# Altium PCB ESP32W_Zzed.PcbDoc (part 1 of 2)
Units mil, origin at the board's own origin, x right, y up, seen from the top; angles counter-clockwise.
Board outline 1900 x 1100 mil, 4 copper layers (Top Layer, Int1 (GND), Int2 (PWR), Bottom Layer), stack 53.912 mil thick; 65 components, 66 nets, 305 pads, 82 vias.
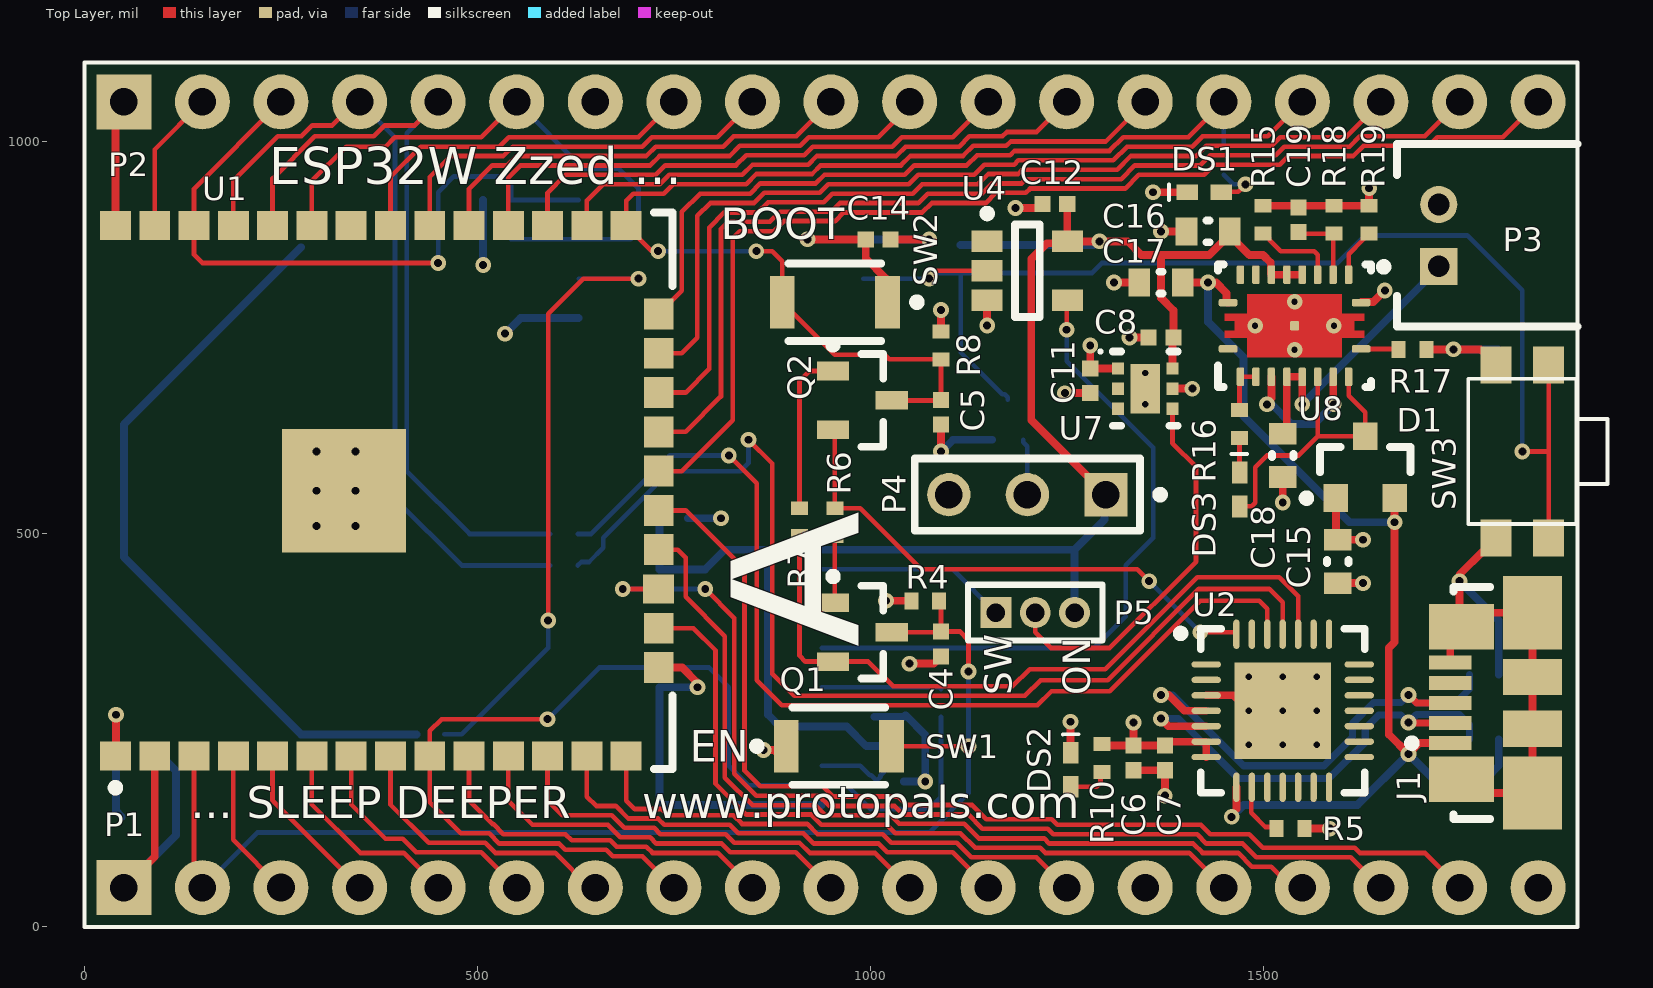
[diagram p0: Top Layer view]
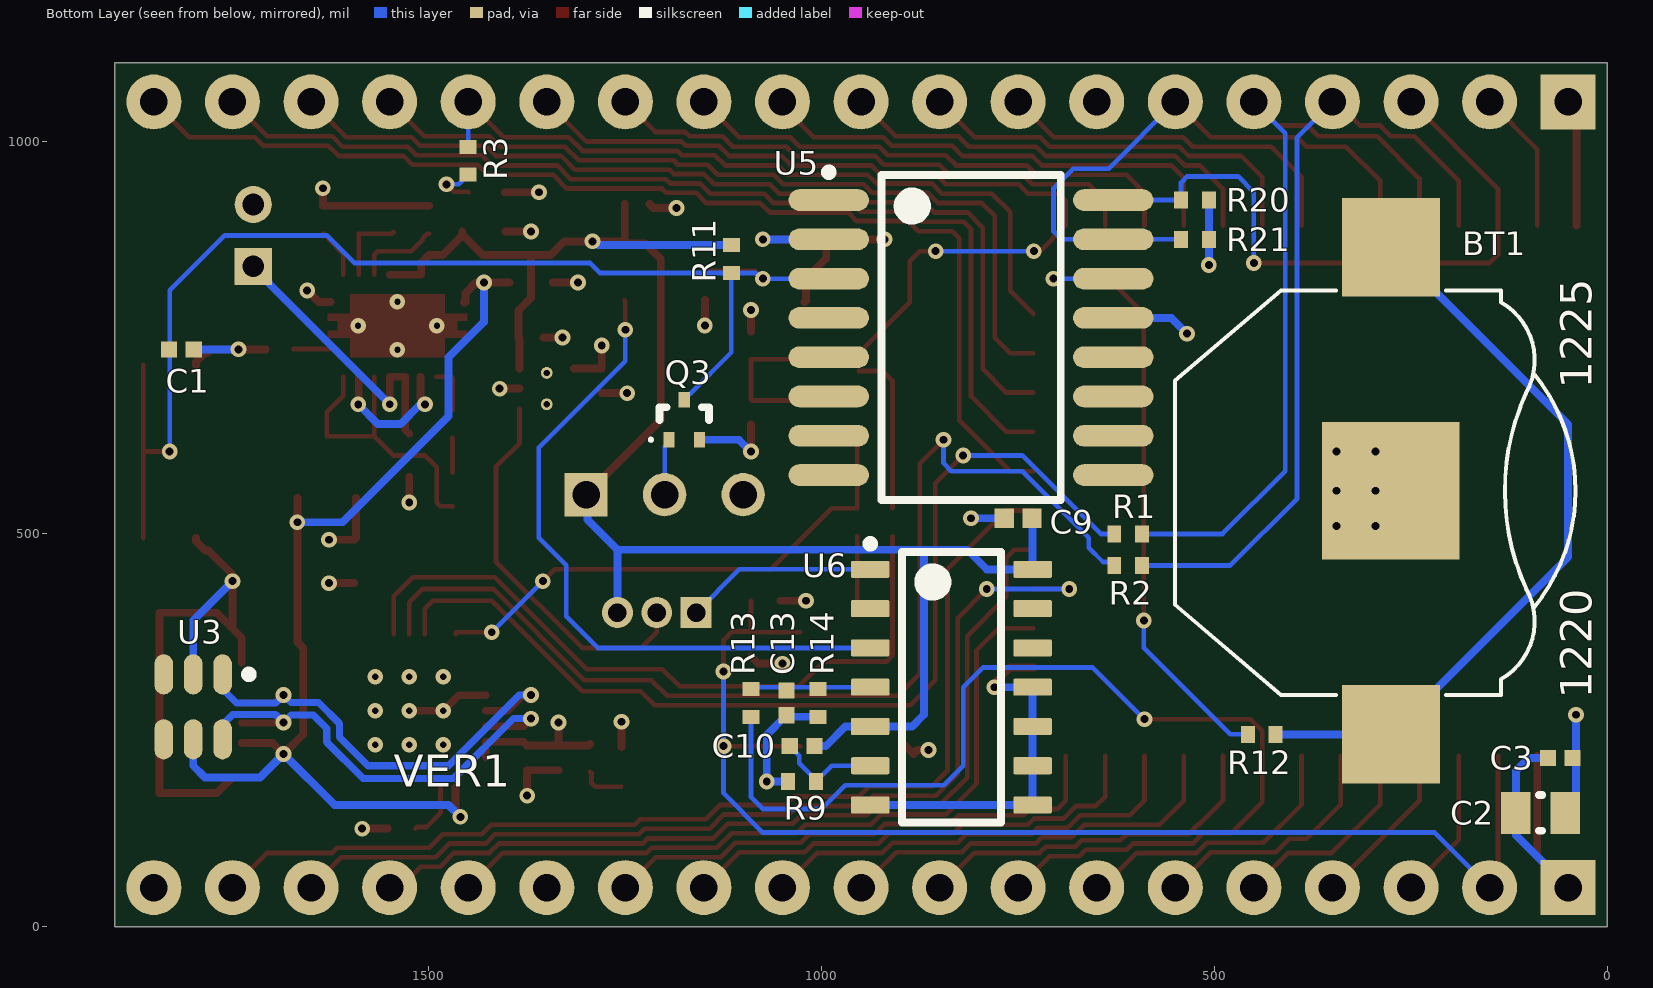
[diagram p1: Bottom Layer view, seen from below]
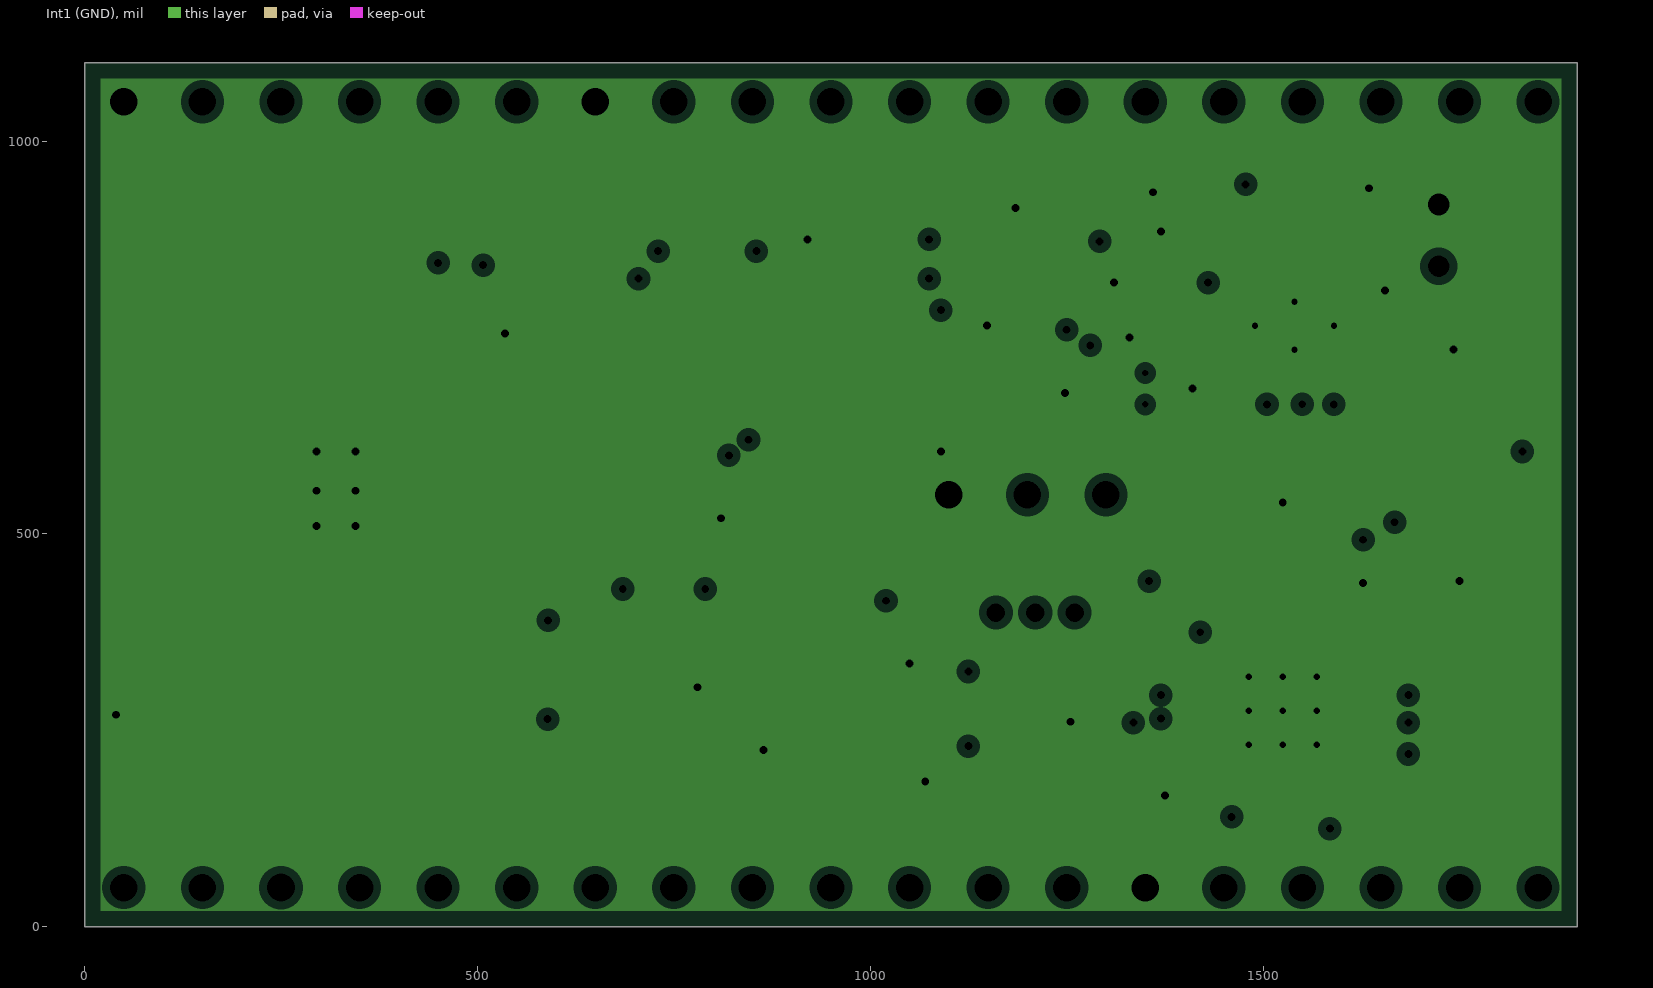
[diagram p2: Int1 (GND), clearances drawn from the general rule]
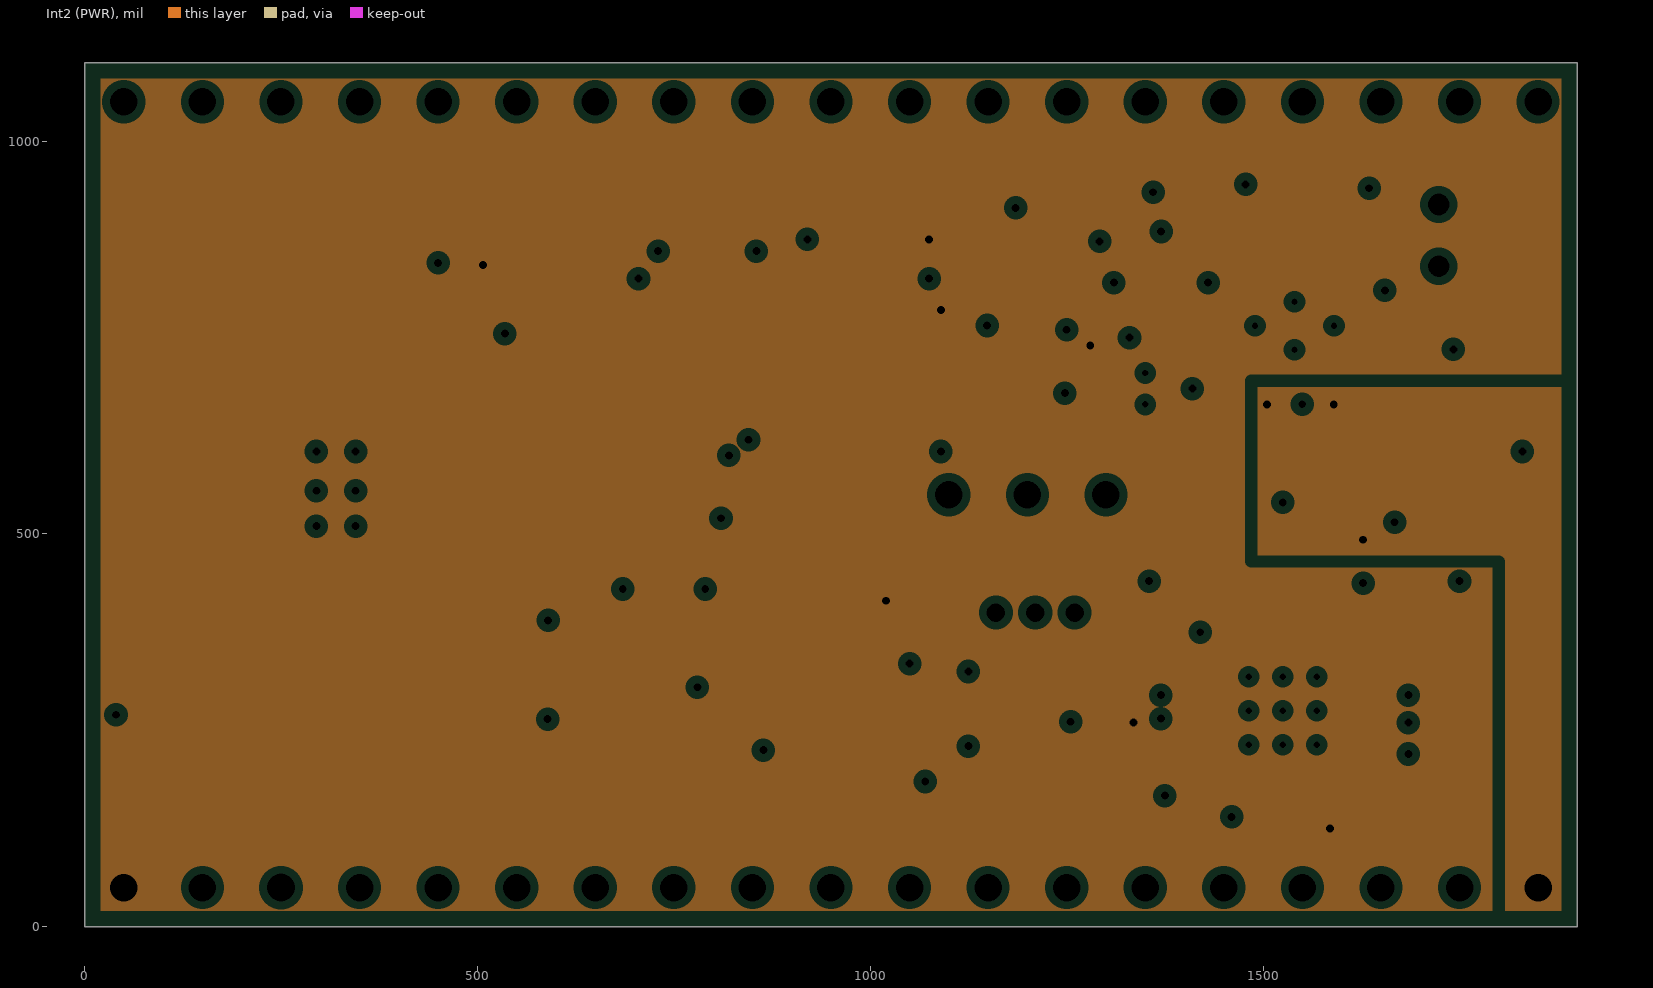
[diagram p3: Int2 (PWR), clearances drawn from the general rule]

## Layer stack, top to bottom
Top Solder: solder mask 1, SM-001, Dk 4
Top Layer: signal copper 1.3779
Dielectric 1: prepreg 5.1, PP-017, Dk 4.3
Dielectric 2: prepreg 5.1, PP-017, Dk 4.3
Int1 (GND): plane copper 1.3779, net GND
Dielectric 3: core 28, Core-039, Dk 4.8
Int2 (PWR): plane copper 1.3779, net (Multiple Nets)
Dielectric 4: prepreg 5.1, PP-017, Dk 4.3
Dielectric 5: prepreg 5.1, PP-017, Dk 4.3
Bottom Layer: signal copper 1.3779
Bottom Solder: solder mask 1, SM-001, Dk 4

## Board outline
0,0 1900,0 1900,1100 0,1100

## Design rules (kind name [scope] priority, off if disabled: settings)
Clearance [All] p1: gap=5.98 ignorepadtopadclearanceinfootprint=FALSE
ComponentClearance ComponentClearance_P2/P3 [InComponent('P2') vs InComponent('P3')] p1: gap=0 collisioncheckmode=3 verticalgap=0 showdistances=FALSE
ComponentClearance [All] p2: gap=10 collisioncheckmode=3 verticalgap=10 showdistances=FALSE
PlaneClearance [All] p1: clearance=10
PlaneConnect [All] p1: pad.planeconnectstyle=Relief pad.reliefexpansion=10 pad.reliefentries=4 pad.reliefconductorwidth=5.98 pad.reliefairgap=5.98 via.planeconnectstyle=Direct via.reliefexpansion=10 via.reliefentries=4 via.reliefconductorwidth=5.98 via.reliefairgap=5.98
PolygonConnect [All] p1: connectstyle=Relief reliefconductorwidth=10 reliefentries=4 polygonreliefangle="90 Angle" airgapwidth=10
RoutingVias [All] p1: holewidth=28 width=50 viastyle="Through Hole" minholewidth=28 minwidth=50 maxholewidth=28 maxwidth=50
SolderMaskExpansion SolderMaskExpansion_VIA [isvia] p1: expansion=-100 istentingtop=FALSE
SolderMaskExpansion [All] p2: expansion=0 istentingtop=FALSE
Width Width_PWR [InNetClass('Power')] p1: maxlimit=19.68 minlimit=7.87 preferedwidth=10
Width [All] p2: maxlimit=10 minlimit=5.98 preferedwidth=5.98
27 further rules are at their usual default settings.

## Classes and differential pairs
net class Power: +3V3 +5 +VO GND NetBT1_1 VBAT VBUS
component class "U_Power Supply": BT1 C1 C8 C9 C10 C11 C12 C13 C14 C15 C16 C17 C18 C19 D1 DS2 DS3 P3 P4 P5 Q3 R9 R10 R11 R12 R13 R14 R15 R16 R17 R18 R19 R20 R21 SW3 U4 U5 U6 U7 U8
component class ESP32W_Zzed: C2 C3 C4 C5 C6 C7 DS1 J1 P1 P2 Q1 Q2 R1 R2 R3 R4 R5 R6 R7 R8 SW1 SW2 U1 U2 U3

## Components (designator, comment, footprint, x,y, rotation, side; value= is the part's Value field where it differs from the comment)
BT1 "1220/1225" "KEYSTONE 3000" 275.59,865 r270 bottom locked
C1 "100nF" CAPC0402(1005)60_L 1815,735 r0 bottom
C2 "22uF 10V" CAPC0805(2012)145_L 85,145 r0 bottom value=22uF
C3 "100nF" CAPC0402(1005)60_L 60,215 r0 bottom
C4 "100nF" CAPC0402(1005)60_L 1090,360 r90 top
C5 "100nF" CAPC0402(1005)60_L 1090,655 r90 top
C6 "4.7uF 6.3V" CAPC0402(1005)60_L 1335,215 r90 top value=4.7uF
C7 "100nF" CAPC0402(1005)60_L 1375,215 r90 top
C8 "100nF" CAPC0402(1005)60_L 1370,750 r0 top
C9 "100nF" CAPC0402(1005)60_N 750,520 r180 bottom
C10 "100nF" CAPC0402(1005)60_L 1025,230 r180 bottom
C11 "1uF 10V" CAPC0402(1005)60_L 1280,695 r270 top value=1uF
C12 "1uF 10V" CAPC0402(1005)60_L 1235,920 r180 top value=1uF
C13 "100nF" CAPC0402(1005)60_L 1045,285 r90 bottom
C14 "100nF" CAPC0402(1005)60_L 1010,875 r0 top
C15 "10uF 10V" CAPC0603(1608)100_L 1595,465 r270 top value=10uF
C16 "10uF 10V" CAPC0603(1608)100_L 1430,885 r180 top value=10uF
C17 "10uF 10V" CAPC0603(1608)100_L 1370,820 r180 top value=10uF
C18 "10uF 10V" CAPC0603(1608)100_L 1525,600 r270 top value=10uF
C19 "10nF" CAPC0402(1005)60_L 1545,900 r270 top
D1 "BAT54CLT3G" ONSC-SOT-23-3-318-08_V 1630,585 r90 top
DS1 "APHHS1005QBC/D" KING-0402_V 1425,935 r180 top
DS2 "APHHS1005SURCK" KING-0402_V 1255,200 r90 top
DS3 "APHHS1005SURCK" KING-0402_V 1470,556.65 r90 top
J1 "47346-0001" MOLX-47346-0001-5_V 1835,285 r90 top
P1 "Header 19" HDR1X19#1 50,50 r0 top
P2 "Header 19" HDR1X19#2 50,1050 r0 top
P3 "S2B-PH-K-S(LF)(SN)" JST-S2B-PH-K-S_V 1820,880 r90 top
P4 "87224-3" TECO-87224-3_V 1200,550 r180 top
P5 "MHDR1X3" MHDR1X3 1160,400 r0 top
Q1 "S8050" KOCN-SOT23-3_L 990,375 r0 top
Q2 "S8050" KOCN-SOT23-3_L 990,670 r0 top
Q3 "DTC114EET1G" ONSC-SC-75-3-463-01_V 1175,645.49 r90 bottom
R1 "0R" RESC0402(1005)_L 610,500 r0 bottom value="0.00 Ohm"
R2 "0R" RESC0402(1005)_L 610,460 r0 bottom value="0.00 Ohm"
R3 "1K" RESC0402(1005)_L 1450,975 r90 bottom value="1000.00 Ohm"
R4 "10K0" RESC0402(1005)_L 1070,415 r180 top value="10000.00 Ohm"
R5 "2K0" RESC0402(1005)_L 1535,125 r0 top value="2000.00 Ohm"
R6 "10K0" RESC0402(1005)_L 955,515 r270 top value="10000.00 Ohm"
R7 "10K0" RESC0402(1005)_L 910,515 r90 top value="10000.00 Ohm"
R8 "10K0" RESC0402(1005)_L 1090,740 r270 top value="10000.00 Ohm"
R9 "1M0" RESC0402(1005)_L 1025,185 r0 bottom value="1000000.00 Ohm"
R10 "1K" RESC0402(1005)_L 1295,215 r270 top value="1000.00 Ohm"
R11 "1M0" RESC0402(1005)_L 1115,850 r90 bottom value="1000000.00 Ohm"
R12 "10K0" RESC0402(1005)_L 440,245 r180 bottom value="10000.00 Ohm"
R13 "10K0" RESC0402(1005)_L 1090,285 r90 bottom value="10000.00 Ohm"
R14 "100K" RESC0402(1005)_L 1005,285 r90 bottom value="100000.00 Ohm"
R15 "49K9" RESC0402(1005)_L 1500,900 r270 top value="49900.00 Ohm"
R16 "1K" RESC0402(1005)_L 1470,640 r90 top value="1000.00 Ohm"
R17 "2K" RESC0402(1005)_L 1690,735 r180 top value="2000.00 Ohm"
R18 "30K" RESC0402(1005)_L 1590,900 r270 top value="30000.00 Ohm"
R19 "10K0" RESC0402(1005)_L 1635,900 r270 top value="10000.00 Ohm"
R20 "4K7" RESC0402(1005)_L 525,925 r180 bottom value="4700.00 Ohm"
R21 "4K7" RESC0402(1005)_L 525,875 r180 bottom value="4700.00 Ohm"
SW1 "B3U-1000P" OMRON-B3U-1000_V 960,230 r0 top
SW2 "B3U-1000P" OMRON-B3U-1000_V 955,795 r180 top
SW3 "434331045822" 434331045822 1830,605 r90 top
U1 "ESP-WROOM-32" OLMX-ESP-WROOM-32 385,555 r90 top locked
U2 "CP2102-GMR" SLAB-QFN-28-3125x3125TP_M 1525,275 r0 top
U3 "NUP2201MR6T1G" ONSC-TSOP-6_V 1800,280 r270 bottom
U4 "NC7S14M5X" FAIR-SOT23-5_V 1200,835 r0 top locked
U5 "DS3231M+" W16MK+1_M 810,750 r180 bottom locked
U6 "CD4013BM96G4" D0014A_L 835,305 r180 bottom
U7 "LP5912Q3.3DRVRQ1" WSON65P200X80_HS-7N 1350,685 r0 top
U8 "BQ24030RHLR" RHL0020A_V 1540,765 r90 top

## Footprints (in the part's own frame and the unit in brackets; to place one, negate y for a bottom-side part, rotate by r counter-clockwise, add the part's x,y. Pads: shape width x height; smd on the part's side, far side on the other; paste and mask are expansions set on the pad)
434331045822 [mm] "4.7*3.5mm side push type,SMD, height 1.65mm, black actuator, 220gf, T&R"
  rect 1.2x1 smd: 1(2.8,0.85) 2(2.8,-0.85) 3(-2.8,0.85) 4(-2.8,-0.85)
  silkscreen extent -2.35,-2.75 2.35,1.75, body extent -3.2,-2.75 3.2,1.75, height 1.65
CAPC0402(1005)60_L [mm] "Chip Capacitor, Body 1.0x0.5mm, Height 0.6mm, IPC High Density"
  rect 0.52x0.52 smd: 1(-0.4,0) 2(0.4,0)
  body extent -0.55,-0.3 0.55,0.3, height 0.6
CAPC0402(1005)60_N [mm] "Chip Capacitor, Body 1.0x0.5mm, Height 0.6mm, IPC Medium Density"
  rect 0.62x0.62 smd: 1(-0.45,0) 2(0.45,0)
  body extent -0.55,-0.3 0.55,0.3, height 0.6
CAPC0603(1608)100_L [mm] "Chip Capacitor, Body 1.6x0.8mm, Height 1.0mm, IPC High Density"
  rect 0.7x0.9 smd: 1(-0.7,0) 2(0.7,0)
  silkscreen extent -0.05,-0.35 0.05,0.35, body extent -0.87,-0.47 0.88,0.48, height 1
CAPC0805(2012)145_L [mm] "Chip Capacitor, Body 2.0x1.2mm, Height 1.45mm, IPC High Density"
  rect 0.95x1.35 smd: 1(-0.8,0) 2(0.8,0)
  silkscreen extent -0.05,-0.58 0.05,0.58, body extent -1.1,-0.72 1.1,0.72, height 1.45
D0014A_L [mm] "SOIC, 14-Leads, Body 8.75x4mm, Pitch 1.27mm, IPC High Density"
  rrect18% 1.25x0.55 smd: 1(-2.625,3.81) 2(-2.625,2.54) 3(-2.625,1.27) 4(-2.625,0) 5(-2.625,-1.27) 6(-2.625,-2.54) 7(-2.625,-3.81) 8(2.625,-3.81) 9(2.625,-2.54) 10(2.625,-1.27) 11(2.625,0) 12(2.625,1.27) 13(2.625,2.54) 14(2.625,3.81)
  silkscreen extent -2.75,-4.38 1.6,4.76, body extent -3.02,-4.32 3.02,4.32, height 1.59
FAIR-SOT23-5_V [mm] "SOT23, 5-Leads, Body 3x1.7mm, Pitch 0.95mm"
  rect 1x0.7 smd: 1(-1.3,0.95) 2(-1.3,0) 3(-1.3,-0.95) 4(1.3,-0.95) 5(1.3,0.95)
  silkscreen extent -1.42,-1.5 0.4,1.97, body extent -1.5,-1.5 1.5,1.5, height 1.45
HDR1X19#1 [mil] "Connector; Header; 19 Position"
  rect 70x70 hole 35: 1(0,0)
  round 70 hole 35: 2(100,0) 4(300,0) 5(400,0) 6(500,0) 7(600,0) 8(700,0) 9(800,0) 10(900,0) 11(1000,0) 12(1100,0) 13(1200,0) 14(1300,0) 15(1400,0) 16(1500,0) 17(1600,0) 18(1700,0) 19(1800,0)
  round 70 hole 35.43: 3(200,0)
HDR1X19#2 [mil] "Connector; Header; 19 Position"
  rect 70x70 hole 35: 1(0,0)
  round 70 hole 35: 2(100,0) 3(200,0) 4(300,0) 5(400,0) 6(500,0) 7(600,0) 8(700,0) 9(800,0) 10(900,0) 11(1000,0) 12(1100,0) 13(1200,0) 14(1300,0) 15(1400,0) 16(1500,0) 17(1600,0) 18(1700,0) 19(1800,0)
JST-S2B-PH-K-S_V [mm] "THD, 2-Leads, Body 7.6x5.9mm, Pitch 2mm"
  rect 1.2x1.2 hole 0.7: 1(-1,2.45)
  round 1.2 hole 0.7: 2(1,2.45)
  silkscreen extent -2.95,-2.03 2.95,4.35, body extent -2.95,-3.8 2.95,3.8, height 4.8
"KEYSTONE 3000" [mil] "CR1225 Cell holder"
  rect 125x125 smd: 1(0,0) 3(620,0)
  rect 175x175 smd: 2(310,0)
  silkscreen extent 55,-275 570,235, body extent -61,-273 685,202, height 126
KING-0402_V [mm] "SMD, 2-Leads, Body 1x0.5mm"
  rect 0.7x0.5 smd: 1(-0.55,0) 2(0.55,0)
  silkscreen extent 1.14,-0.25 1.14,0.25, body extent -0.5,-0.25 0.5,0.25, height 0.6
KOCN-SOT23-3_L [mm] "SOT23, 3-Leads, Body 1.35x2.95mm, Pitch 0.95mm, IPC High Density"
  rect 1.05x0.6 smd: 1(-0.95,0.95) 2(-0.95,-0.95) 3(0.95,0)
  silkscreen extent -1.07,-1.5 0.67,1.92, body extent -0.67,-1.47 0.67,1.48, height 1.1
MHDR1X3 [mm] "Connector; Header; 3 Position"
  rect 1x1 hole 0.6: 1(0,0)
  round 1 hole 0.6: 2(1.27,0) 3(2.54,0)
  silkscreen extent -0.9,-0.9 3.44,0.9
MOLX-47346-0001-5_V [mm] "SMD, 5-Leads, Body 7.5x5mm, Pitch 0.65mm"
  rect 0.45x1.38 smd: 1(-1.3,2.46) 2(-0.65,2.46) 3(0,2.46) 4(0.65,2.46) 5(1.3,2.46)
  rect 1.475x2.1 smd: 6(-2.462,2.1) 7(2.462,2.1)
  rect 2.375x1.9 smd: 8(-2.913,-0.2) 11(2.913,-0.2)
  rect 1.175x1.9 smd: 9(-0.837,-0.2) 10(0.837,-0.2)
  silkscreen extent -3.75,1.16 3.75,3.82, body extent -3.99,-2.78 3.99,2.65, height 2.69
OLMX-ESP-WROOM-32 [mm] "SMD, 38-Leads, Body 18x25.5mm, Pitch 1.27mm"
  rect 0.95x1 smd: 1(-8.575,8.78) 2(-8.575,7.51) 3(-8.575,6.24) 4(-8.575,4.97) 5(-8.575,3.7) 6(-8.575,2.43) 7(-8.575,1.16) 8(-8.575,-0.11) 9(-8.575,-1.38) 10(-8.575,-2.65) 11(-8.575,-3.92) 12(-8.575,-5.19) 13(-8.575,-6.46) 14(-8.575,-7.73) 17(-3.175,-8.78) 25(8.575,-7.73) 26(8.575,-6.46) 27(8.575,-5.19) 28(8.575,-3.92) 29(8.575,-2.65) 30(8.575,-1.38) 31(8.575,-0.11) 32(8.575,1.16) 33(8.575,2.43) 34(8.575,3.7) 35(8.575,4.97) 36(8.575,6.24) 37(8.575,7.51) 38(8.575,8.78)
  rect 4x4 smd: 1(0,1.395)
  rect 1x0.95 smd: 15(-5.715,-8.78) 16(-4.445,-8.78) 18(-1.905,-8.78) 19(-0.635,-8.78) 20(0.635,-8.78) 21(1.905,-8.78) 22(3.175,-8.78) 23(4.445,-8.78) 24(5.715,-8.78)
  silkscreen extent -14.1,-38.48 13.84,9.78, body extent -9.04,-9.25 9.03,16.29, height 3.04
OMRON-B3U-1000_V [mm] "SMD, 2-Leads, Body 3x2.5mm"
  rect 0.8x1.7 smd: 1(-1.7,0) 2(1.7,0)
  silkscreen extent -2.77,-1.25 1.5,1.25, body extent -1.5,-1.25 1.5,1.25, height 1.75
ONSC-SC-75-3-463-01_V [mil] "SOT23, 3-Leads, Body 1.6x0.8mm, Pitch 0.5mm"
  rect 20x14.02 smd: 1(-25.49,19.68) 2(-25.49,-19.69) 3(25.49,0)
  silkscreen extent -27,-31 16,44, body extent -16,-31 16,31, height 35
ONSC-SOT-23-3-318-08_V [mm] "SOT23, 3-Leads, Body 2.92x1.3mm, Pitch 0.95mm"
  rect 0.9x0.8 smd: 1(-1,0.95) 2(-1,-0.95) 3(1,0)
  silkscreen extent -1.12,-1.46 0.65,2.02, body extent -0.65,-1.46 0.65,1.46, height 1.11
ONSC-TSOP-6_V [mm] "TSOP, 6-Leads, Body 3.1x1.7mm (max), Pitch 0.95mm, Height 1.1mm"
  oval 1.3x0.6 smd: 1(-1.05,0.95) 2(-1.05,0) 3(-1.05,-0.95) 4(1.05,-0.95) 5(1.05,0) 6(1.05,0.95)
  silkscreen extent -1.17,1.68 -0.93,1.92, body extent -0.85,-1.55 0.85,1.55, height 1.1
RESC0402(1005)_L [mm] "Chip Resistor, Body 1.0x0.5mm, IPC High Density"
  rect 0.45x0.55 smd: 1(-0.45,0) 2(0.45,0)
  body extent -0.52,-0.27 0.53,0.28, height 0.4
RHL0020A_V [mm] "QFN, 20-Leads, Body 4.5x3.5mm, Pitch 0.5mm, Thermal Pad 3.05x2.05mm, TI Recommended"
  rrect42% 0.24x0.6 smd: 1(-0.75,2.15) 10(-0.75,-2.15) 11(0.75,-2.15) 20(0.75,2.15)
  rrect42% 0.6x0.24 smd: 2(-1.65,1.75) 3(-1.65,1.25) 4(-1.65,0.75) 5(-1.65,0.25) 6(-1.65,-0.25) 7(-1.65,-0.75) 8(-1.65,-1.25) 9(-1.65,-1.75) 12(1.65,-1.75) 13(1.65,-1.25) 14(1.65,-0.75) 15(1.65,-0.25) 16(1.65,0.25) 17(1.65,0.75) 18(1.65,1.25) 19(1.65,1.75)
  rrect33% 0.3x0.3 smd paste-0.15 mask+0: 21(0,0)
  Top Layer region: 0.16,2.25 0.16,1.925 -0.16,1.925 -0.16,2.25 -0.39,2.25 -0.39,1.525 -1.025,1.525 -1.025,-1.525 -0.39,-1.525 -0.39,-2.25 -0.16,-2.25 -0.16,-1.925 0.16,-1.925 0.16,-2.25 0.39,-2.25 0.39,-1.525 1.025,-1.525 1.025,1.525 0.39,1.525 0.39,2.25
  silkscreen extent -1.98,-2.47 1.98,2.47, body extent -1.82,-2.33 1.83,2.32, height 1.01
SLAB-QFN-28-3125x3125TP_M [mm] "QFN, 28-Leads, Body 5x5mm, Pitch 0.5mm, Thermal Pad 3.13x3.13mm, IPC Low Density"
  oval 0.95x0.2 smd: 1(-2.475,1.5) 2(-2.475,1) 3(-2.475,0.5) 4(-2.475,0) 5(-2.475,-0.5) 6(-2.475,-1) 7(-2.475,-1.5) 15(2.475,-1.5) 16(2.475,-1) 17(2.475,-0.5) 18(2.475,0) 19(2.475,0.5) 20(2.475,1) 21(2.475,1.5)
  oval 0.2x0.95 smd: 8(-1.5,-2.475) 9(-1,-2.475) 10(-0.5,-2.475) 11(0,-2.475) 12(0.5,-2.475) 13(1,-2.475) 14(1.5,-2.475) 22(1.5,2.475) 23(1,2.475) 24(0.5,2.475) 25(0,2.475) 26(-0.5,2.475) 27(-1,2.475) 28(-1.5,2.475)
  rect 3.13x3.13 smd: 29(0,0)
  silkscreen extent -3.42,-2.65 2.65,2.65, body extent -2.5,-2.5 2.5,2.5, height 1
TECO-87224-3_V [mm] "THD, 3-Leads, Body 7.21x2.31mm, Pitch 2.54mm"
  rect 1.4x1.4 hole 0.889: 1(-2.54,0)
  round 1.4 hole 0.889: 2(0,0) 3(2.54,0)
  silkscreen extent -4.42,-1.17 3.64,1.17, body extent -3.61,-1.17 3.61,1.17, height 10.36
W16MK+1_M [mm] "SOIC, 16-Leads, Body 10.3x7.5mm, Pitch 1.27mm, IPC Low Density"
  oval 2.6x0.7 smd: 1(-4.6,4.445) 2(-4.6,3.175) 3(-4.6,1.905) 4(-4.6,0.635) 5(-4.6,-0.635) 6(-4.6,-1.905) 7(-4.6,-3.175) 8(-4.6,-4.445) 9(4.6,-4.445) 10(4.6,-3.175) 11(4.6,-1.905) 12(4.6,-0.635) 13(4.6,0.635) 14(4.6,1.905) 15(4.6,3.175) 16(4.6,4.445)
  silkscreen extent -4.72,-5.25 2.9,5.47, body extent -3.8,-5.25 3.8,5.25, height 2.65
WSON65P200X80_HS-7N [mm] "WSON, 6-Leads, Body 2.00x2.00mm, Pitch 0.65mm, Thermal Pad 1.60x0.96mm, IPC Medium Density"
  rect 0.4x0.4 smd mask+0.05: 1(-0.88,0.65) 2(-0.88,0) 3(-0.88,-0.65) 4(0.88,-0.65) 5(0.88,0) 6(0.88,0.65)
  round 0.381 hole 0.2 mask+0: 2(0,0.508) 3(0,-0.508)
  rect 0.96x1.6 smd mask+0.05: 7(0,0)
  silkscreen extent -1.5,-1.2 1.05,1.25, body extent -1.05,-1.05 1.05,1.05, height 0.8

## Part data
BT1: library part 3000, "Keystone 3000"
C1 C3 C4 C5 C7 C8 C9 C10 C13 C14: library part CMP-1034-02077-1, "CAP 100nF 50V ±10% 0402 (1005 Metric) Thickness 0.6mm SMD", Case-EIA=0402, Case-Metric=1005, Rated Voltage="50 V", Tolerance=Â±10%, Max Thickness="0.6 mm", Technology=SMT
C2: library part CMP-1036-04942-1, "CAP 22uF 10V ±10% 0805 (2012 Metric) Thickness 1.45mm SMD", Case-EIA=0805, Case-Metric=2012, Rated Voltage="10 V", Tolerance=Â±10%, Max Thickness="1.45 mm", Technology=SMT
C6: library part CMP-1034-02137-1, "CAP 4.7uF 6.3V ±20% 0402 (1005 Metric) Thickness 0.6mm SMD", Case-EIA=0402, Case-Metric=1005, Rated Voltage="6.3 V", Tolerance=Â±20%, Max Thickness="0.6 mm", Technology=SMT
C11 C12: library part CMP-1034-02116-1, "CAP 1uF 10V ±10% 0402 (1005 Metric) Thickness 0.6mm SMD", Case-EIA=0402, Case-Metric=1005, Rated Voltage="10 V", Tolerance=Â±10%, Max Thickness="0.6 mm", Technology=SMT
C15 C16 C17 C18: library part CMP-1035-02800-1, "CAP 10uF 10V ±20% 0603 (1608 Metric) Thickness 1mm SMD", Case-EIA=0603, Case-Metric=1608, Rated Voltage="10 V", Tolerance=Â±20%, Max Thickness="1 mm", Technology=SMT
C19: library part CMP-1034-01886-1, "CAP 10nF 50V ±10% 0402 (1005 Metric) Thickness 0.6mm SMD", Case-EIA=0402, Case-Metric=1005, Rated Voltage="50 V", Tolerance=Â±10%, Max Thickness="0.6 mm", Technology=SMT
D1: library part CMP-1055-00545-1, "Dual Common Cathode Schottky Barrier Diodes, 3-Pin SOT-23, Pb-Free, Tape and Reel", Manufacturer="On Semiconductor", ComponentLink1Description="Manufacturer URL", ComponentLink1URL=http://www.onsemi.com/, ComponentLink2Description=Datasheet, ComponentLink2URL=http://www.onsemi.cn/pub_link/Collateral/BAT54CLT1-D.PDF, ComponentLink3Description="Package Specification", ComponentLink3URL=http://www.onsemi.cn/pub_link/Collateral/318-08.PDF, Configuration="Common Cathode", DatasheetVersion="Rev. 8", IFSM Max (A)=0.6, Mounting Technology="Surface Mount", PackageDescription="3-Pin Small Outline Transistor, Body 2.92 x 1.3 mm, Pitch 0.95 mm", PackageReference=SOT-23-3-318-08, PackageVersion="Rev. AP, 11/2009", Packing="Tape and Reel", PartNumber=BAT54CLT3G, RoHS=TRUE, trr Max (ns)=5
DS1 DS2 DS3: library part CMP-2000-05787-1, "Red Water Clear Chip LED Lamp, 1.95 V, 20 mA, -40 to 85 degC, 2-Pin SMD (0402), RoHS, Tape and Reel", Color=Red, Current - Test=20mA, Manufacturer=Kingbright, Millicandela Rating=220mcd, Package / Case=0402(1005Metric), Package Description="2-Pin Surface Mount Device, Body 1 x 0.5 mm", Package Reference=0402, Standard Package=2,000, Voltage - Forward (Vf) (Typ)=1.95V, 3D Model="APHHS1005x.sldprt /  / APHHS1005x.pro /  / APHHS1005x.igs /  / APHHS1005x.stp", Catalog Drawings="APHHS1005SeriesSide /  / APHHS1005SeriesTop", Category=Optoelectronics, Datasheet URL=https://datasheet.ciiva.com/4689/aphhs1005surck-32322-4689068.pdf, Datasheet Version="Rev. 8, 08/2010", Family=LEDIndication-Discrete, Height=0.60mm, Lens Style/Size=RectanglewithFlatTop,0.8mmx0.5mm, Lens Type=Clear, Manufacturer URL=http://www.kingbright.com/, Mounting Technology=SurfaceMount, Mounting Type=SurfaceMount, Online Catalog=0402RectanglewithFlatTopChipLEDs, Other Names=754-1104-2, Packaging=Tape&Reel(TR), Size / Dimension=1.00mmLx0.50mmW, Viewing Angle=120°, Wavelength - Dominant=630nm, Wavelength - Peak=650nm
J1: library part CMP-2000-05246-1, "Micro-USB B Receptacle with Flange, -30 to 85 degC, 5-Pin SMD, RoHS, Tape and Reel", Color=Black, Manufacturer=Molex, Maximum Current Rating=1.8/ContactA, Maximum Voltage Rating=30VAC, Operating Temperature=-30to85C, Body Orientation=RightAngle, Contact Material=CopperAlloy, Contact Plating=GoldOverPalladiumNickelOverNickel, Datasheet URL=https://datasheet.ciiva.com/30075/304740473460001-io-nectors-30075527.pdf, Datasheet Version=Dec-13, Dimension=7.8x5.43x2.94mm, Gender=RCP, Housing Material=LiquidCrystalPolymer, Manufacturer URL=http://www.molex.com/, Mounting=SurfaceMount, Number Of Contacts=5, Number of Ports=1, Number of Terminals=5, Packaging=EmbossedTapeandReel, Part No=47346-0001, Pitch=0.65mm, RoHS=Yes, Termination Method=Solder, Type=MicroUSBTypeB
P1 P2: "Header, 19-Pin", LatestRevisionDate=17-Jul-2002, LatestRevisionNote="Re-released for DXP Platform.", Publisher="Altium Limited"
P3: library part CMP-1755-00004-1, "Male Header, Pitch 2 mm, 1 x 2 Position, Height 4.8 mm, Tail Length 3.4 mm, -25 to 85 degC, RoHS, Bulk", Capacitance="10 uF", Case\Package=Radial, Max Operating Temperature="85 degC", Min Operating Temperature="-40 degC", Package Quantity=200, Tolerance=20%, Voltage Rating="50 V", ComponentLink1Description=Datasheet, ComponentLink1URL=http://www.jst-mfg.com/product/pdf/eng/ePH.pdf, DatasheetVersion=Dec-12, Diameter="5 mm", Height="11 mm", Lead Pitch="2 mm", Length="11 mm", Mount="Through Hole", PackageDescription="Male Header, Pitch 2 mm, 1 x 2 Position, Height 4.8 mm, Tail Length 3.4 mm", PackageReference=S2B-PH-K-S, Packaging=Bulk, Pins=2, Radiation Hardening=No, REACH SVHC="No SVHC", RoHSCompliant=true, Voltage Rating (DC)="50 V"
P4: library part CMP-2000-05697-1, "Male Header, Pitch 2.54 mm, 1 x 3 Position, Height 10.744 mm, Tail Length 3.175 mm, -65 to 105 degC, RoHS, Bulk", Color=Black, Manufacturer="TE Connectivity", Package Description="Male Header, Pitch 2.54 mm, 1 x 3 Position, Height 10.744 mm, Tail Length 3.175 mm", Standard Package=520, 3D Model=87224-3.pdf, Catalog Drawings="SingleSquareStraightPost /  / SingleSquareStraightPostSide", Category=Connectors,Interconnects, Connector Type=Header,Unshrouded, Contact Finish=Gold, Contact Finish Thickness=15µin(0.38µm), Contact Mating Length="0.318\"(8.08mm)", Contact Type=MalePin, Datasheet URL=http://www.te.com/commerce/DocumentDelivery/DDEController?Action=showdoc&DocId=Customer+Drawing%7F87224%7FL3%7Fpdf%7FEnglish%7FENG_CD_87224_L3.pdf%7F87224-3, Datasheet Version="Rev. L3, 08/2015", Dynamic Catalog=AMPMODUModIISeries, Family=RectangularConnectors-Headers,MalePins, Featured Product=AMPMODUConnectors, Manufacturer URL=http://www.te.com/, Mating Products="147738-2-ND / -CONNRCPT3POSVERTSMDGOLD / 147723-2-ND / -CONNRCPT3POSVERT.100GOLD / 146763-5-ND / -CONNRCPT3POSSGLVERT.100T/H / A32904-ND / -CONNRECEPT3POS.100VERTGOLD / A26922-ND / -CONNHOUSING3POS.100LOCKING / A26415-ND / -CONNRECEPT3POS.100VERTAU / A26964-ND / -CONNHOUSING3POS.100SINGLE / A3012-ND / -CONNHOUSING3POS.100SINGLE", Mounting Technology=ThroughHole, Mounting Type=ThroughHole, Number of Positions=3, Number of Positions Loaded=All, Number of Rows=1, Other Names="87224-3-ND / A26545", Package Reference=87224-3, Packaging=Bulk, Pitch="0.100\"(2.54mm)", RoHS Information=87224-3StatementofCompliance, Series=AMPMODUModII, Termination=Solder
P5: "Header, 3-Pin", LatestRevisionDate=17-Jul-2002, LatestRevisionNote="Re-released for DXP Platform.", Publisher="Altium Limited"
Q1 Q2: library part CMP-0564-00001-2, "NPN Transistor, 0.8 A Collector Current, 3-Pin SOT23, RoHS, Tape and Reel", Manufacturer="Koo Chin", ComponentLink1Description="Manufacturer URL", ComponentLink1URL=http://www.hz-dz.net/, ComponentLink2Description=Datasheet, ComponentLink2URL=http://www.hz-dz.net/UploadFiles/2009812164318190.pdf, ComponentLink3Description="Package Specification", ComponentLink3URL=http://galaxycn.com/jsp/upload/S8050.pdf, DatasheetVersion=17/08/2009, fT(min)="150 MHz", ICBO (max)="0.1 uA", ICEO (max)="0.1 uA", IEBO (max)="0.1 uA", Mounting Technology="Surface Mount", NPN/PNP=NPN, PackageDescription="3-Pin Small Out-Line Transistor, Body 1.3 x 2.9 mm, Pitch 0.95 mm", PackageReference=SOT23-3, Packing="Tape and Reel", PartNumber=S8050, RoHS=TRUE, V (BR) CBO (min)="40 V", V (BR) CEO (min)="25 V", V (BR) EBO (min)="5 V", VBE (sat) (max)="1.2 V", VCE (sat) (max)="0.6 V"
Q3: library part CMP-0630-00210-1, "Digital Transistor (BRT), R1=10 kOhm, R2=10 kOhm, NPN Transistor, 3-Pin SC-75, Pb-Free, Tape and Reel", Manufacturer="On Semiconductor", ComponentLink1Description="Manufacturer URL", ComponentLink1URL=http://www.onsemi.com/, ComponentLink2Description=Datasheet, ComponentLink2URL=http://www.onsemi.cn/pub_link/Collateral/DTC114E-D.PDF, ComponentLink3Description="Package Specification", ComponentLink3URL=http://www.onsemi.com/pub_link/Collateral/463-01.PDF, DatasheetVersion="Rev. 5", hFE Min=35, IC Continuous (A)=0.1, Mounting Technology="Surface Mount", PackageDescription="3-Pin Small Outline Transistor, Body 1.6 x 0.8 mm, Pitch 0.5 mm", PackageReference=SC-75-3-463-01, PackageVersion="Rev. F, 07/2005", Packing="Tape and Reel", PartNumber=DTC114EET1G, Polarity=NPN, R1/R2 Typ=1, RoHS=TRUE, V(BR)CEO Min (V)=50
R1 R2: library part CMP-1011-00001-1, "Jumper 0402 (1005 Metric)", Case-EIA=0402, Case-Metric=1005, Power=None, Technology=SMT, Tolerance=None
R3 R10 R16: library part CMP-1011-00510-1, "1K 0.063W 1% 0402 (1005 Metric)  SMD", Case-EIA=0402, Case-Metric=1005, Power="0.063 W", Tolerance="1 %", Technology=SMT
R4 R6 R7 R8 R12 R13 R19: library part CMP-1011-00623-1, "10K 0.063W 1% 0402 (1005 Metric)  SMD", Case-EIA=0402, Case-Metric=1005, Power="0.063 W", Tolerance="1 %", Technology=SMT
R5 R17: library part CMP-1011-00542-1, "2K 0.063W 1% 0402 (1005 Metric)  SMD", Case-EIA=0402, Case-Metric=1005, Power="0.063 W", Tolerance="1 %", Technology=SMT
R9 R11: library part CMP-1011-00849-1, "1M 0.063W 1% 0402 (1005 Metric)  SMD", Case-EIA=0402, Case-Metric=1005, Power="0.063 W", Tolerance="1 %", Technology=SMT
R14: library part CMP-1011-00736-1, "100K 0.063W 1% 0402 (1005 Metric)  SMD", Case-EIA=0402, Case-Metric=1005, Power="0.063 W", Tolerance="1 %", Technology=SMT
R15: library part CMP-1011-00702-1, "49K9 0.063W 1% 0402 (1005 Metric)  SMD", Case-EIA=0402, Case-Metric=1005, Power="0.063 W", Tolerance="1 %", Technology=SMT
R18: library part CMP-1011-00675-1, "30K 0.063W 1% 0402 (1005 Metric)  SMD", Case-EIA=0402, Case-Metric=1005, Power="0.063 W", Tolerance="1 %", Technology=SMT
R20 R21: library part CMP-1011-00586-1, "4K7 0.063W 1% 0402 (1005 Metric)  SMD", Case-EIA=0402, Case-Metric=1005, Power="0.063 W", Tolerance="1 %", Technology=SMT
SW1 SW2: library part CMP-2100-03586-1, "Ultra-Small Tactile Switch, 0.05 A, 12 V, -25 to 70 degC, 2-Pin SMD, RoHS, Tape and Reel", Case/Package=SMD/SMT, Contact Current Rating=50mA, Insulation Resistance=100MOhm, Manufacturer="Omron Electronic Components", Max Operating Temperature=70degC, Min Operating Temperature=-25degC, Operating Force=1.5N, Package Description="2-Pin Surface Mount Device, Body 3 x 2.5 mm", Package Quantity=1, Package Reference=B3U-1000, Voltage Rating (DC)=12V, Actuator Length=0.4mm, Contact Material=Silver, Current Rating=50mA, Datasheet URL=http://www.omron.com/ecb/products/pdf/en-b3u.pdf, Datasheet Version=42005.0, Depth=2.5mm, Electrical Life=200000Cycles, Height=1.2mm, Illumination Type=Illuminated, Lead Free=LeadFree, Length=4mm, Manufacturer URL=http://www.omron.com/, Max Current Rating=50mA, Mount=SurfaceMount, Orientation=Straight, Packaging=TapeandReel, REACH SVHC=Unknown, RoHSCompliant=true, Switch Travel=0.15mm, Termination=SMD/SMT, Throw Configuration=SPST, Weight=0.022g, Width=3mm
SW3: library part CMP-1461-00001-1, "WS-TASU SMD Tact Switch 4.7X3.5 mm side push", Manufacturer="Wuerth Elektronik", ComponentLink1Description="Manufacturer URL", ComponentLink1URL=http://www.we-online.com, ComponentLink2Description=Datasheet, ComponentLink2URL=http://katalog.we-online.de/em/datasheet/434331045822.pdf, NoPins=04, PackageReference=434331045822, PartNumber=434331045822
U1: library part CMP-2000-07454-1, "Espressif System, 2.7 to 3.6 V, -40 to 85 degC, 38-Pin SMD", Manufacturer=Olimex, Package Description="38-Pin Surface Mount Device, Body 18 x 25.5 mm, Pitch 1.27 mm", Datasheet URL=http://www.espressif.com/sites/default/files/documentation/esp-wroom-32_datasheet_en.pdf, Datasheet Version="Rev. 2.1, 09/2017", Manufacturer URL=https://www.olimex.com, Mounting Technology=SurfaceMount, Package Reference=ESP-WROOM-32, RoHSCompliant=false
U2: library part CMP-2000-04924-1, "Single-Chip USB to URAT Bridge, 3.3 V, -40 to 85 degC, 28-Pin QFN, RoHS, Tape and Reel", Manufacturer="Silicon Labs", Operating Supply Voltage (Max)=3.6V, Operating Supply Voltage (Min)=3V, Operating Supply Voltage (Typ)=3.3V, Operating Temperature (Max)=85C, Operating Temperature (Min)=-40C, Operating Temperature Classification=Industrial, Package Description="28-Pin Quad-Flat No-Leads Package, Body 5 x 5 mm, Pitch 0.5 mm", Package Reference=QFN-28, Package Type=QFNEP, Supply Current=26mA, Data Rate=1000kbps, Datasheet URL=http://www.mouser.com/ds/2/368/CP2102-9-247052.pdf, Datasheet Version="Rev. 1.6, 12/2013", Interface Circuit Standard 1=RS-232, Manufacturer URL=http://www.silabs.com/, Mounting=SurfaceMount, Number of Channels=1, Package URL=http://www.silabs.com/Support%20Documents/TechnicalDocs/C8051T61x.pdf, Packaging=TapeandReel, PartId=1, Pin Count=28, Rad Hardened=No, Transmitter and Receiver FIFO Counter=No
U3: library part CMP-0260-00001-1, "ESD Protection Diodes with Low Clamping Voltage", Peak Power Dissipation="500 W", Storage Temperature="-55 to 125 degC", ComponentLink1Description="Manufacturer URL", ComponentLink1URL=http://www.onsemi.com/, ComponentLink2Description=Datasheet, ComponentLink2URL=http://www.onsemi.cn/pub_link/Collateral/NUP2201MR6-D.PDF, ComponentLink3Description="Package Specification", ComponentLink3URL=http://www.onsemi.com/pub_link/Collateral/318G-02.PDF, DatasheetVersion="Rev. 4, 02/2013", Mounting Technology="Surface Mount", PackageDescription="6-Pin Thin Small Outline, 3 x 1.5 mm Body, 0.95 mm Pitch", PackageReference=TSOP-6, PackageVersion="Rev. V, 6/2012", PartNumber=NUP2201MR6T1G
U4: library part CMP-2000-06808-1, "TinyLogic HS Inverter with Schmitt Trigger Input, 2 to 6 V, -40 to 85 degC, 5-Pin SOT23, RoHS, Tape and Reel", Current - Output High, Low=2.6mA,2.6mA, Current - Quiescent (Max)=1µA, Manufacturer="Fairchild Semiconductor", Operating Temperature=-40°C~85°C, Package / Case=SC-74A,SOT-753, Package Description="5-Pin Small Outline Transistor, Body 2.9 x 1.6 mm, Pitch 0.95 mm", Package Reference=SOT23-5, Package Version=08/2015, Standard Package=3,000, Supplier Device Package=SOT-23-5, Voltage - Supply=2V~6V, Category=IntegratedCircuits(ICs), Datasheet URL=https://www.fairchildsemi.com/datasheets/NC/NC7S14.pdf, Datasheet Version=08/2004, Dynamic Catalog=7S, Family=Logic-GatesandInverters, Features=SchmittTrigger, Logic Level - High=1.5V~4.2V, Logic Level - Low=0.3V~1.5V, Logic Type=Inverter,Buffer, Manufacturer URL=https://www.fairchildsemi.com/, Max Propagation Delay @ V, Max CL=17ns@6V,50pF, Mounting Technology=SurfaceMount, Mounting Type=SurfaceMount, Number of Circuits=1, Number of Inputs=1, Other Names=NC7S14M5XTR, Package URL=https://www.fairchildsemi.com/package-drawings/MA/MA05B.pdf, Packaging=Tape&Reel(TR), PartId=1, Product Change Notification=MoldCompoundChange12/Dec/2007, Series=7S
U5: library part CMP-0254-00003-2, "+/-5ppm, MEMS based Real-Time Clock, I2C Interface, 16-Pin SO, -40 to 85 degC, Pb-Free", Code_IPC=SOIC127P1030-16, Code_JEDEC=MS-013-AA, ComponentLink1Description="Manufacturer URL", ComponentLink1URL=http://www.maxim-ic.com, ComponentLink2Description=Datasheet, ComponentLink2URL=http://datasheets.maxim-ic.com/en/ds/DS3231M.pdf, ComponentLink3Description="Package Specification", ComponentLink3URL=http://pdfserv.maxim-ic.com/package_dwgs/21-0042.PDF, DatasheetVersion="Rev 3, Dec-2011", PackageDescription="16-Pin Small-Outline IC, Wide (0.3in), 1.27 mm Pitch, SOIC (W), Pb-Free", PackageReference=W16MK+1, PackageVersion="revD, 2010", PartId=1
U6: library part CMP-1619-00046-2, "CMOS Dual D-Type Flip Flop, D0014A, LARGE T&R", F @ Nom Voltage(Max)(Mhz)=8, Generic Part Number=CD4013B, ICC @ Nom Voltage(Max)(mA)=0.06, Manufacturer="Texas Instruments", Operating Temperature Range(C)="-55 to 125", Rating=Military, tpd @ Nom Voltage(Max)(ns)=130, Voltage(Nom)(V)=10, 3-State Output=No, Bits(#)=2, Code_JEDEC=MS-012, DatasheetVersion=SCHS023D, Input Type=CMOS, Output Drive (IOL/IOH)(Max)(mA)=1.5/-1.5, Output Logic=Inverted,Non-inverted, Output Type=CMOS, PackageReference=D0014A, PartId=1, Schmitt Trigger=No, Technology Family=CD4000, VCC(Max)(V)=18, VCC(Min)(V)=3
U7: "Linear Voltage Regulator IC 1 Output 500mA 6-WSON (2x2)"
U8: library part CMP-0321-00129-2, "Dual Input Li-Ion Charger with Dynamic Power-Path Management, Output regulated to 6 V, Vbat 4.2 V, 4.3 V, -40 to 85 degC, 20-pin QFN (RHL), Green (RoHS & no Sb/Br)", Manufacturer="Texas Instruments", Over Voltage Protection=N, ComponentLink1Description=Datasheet, ComponentLink1URL=http://www.ti.com/general/docs/lit/getliterature.tsp?genericPartNumber=BQ24030&fileType=pdf, DatasheetVersion=SLUS618H, Eco-Plan="Green (RoHS & no Sb/Br)", Lead Acid=N, Li-Ion=Y, Li-Polymer=Y, Mounting Technology="Surface Mount", NiCd=N, NiMH=N, PackageDescription="20-Leads Plastic Quad Flatpack No-Lead, 4.5 x 3.5 x 0.9 mm Body, 0.5 mm Pitch, Exposed Pad", PackageReference=RHL0020A, PackageVersion="revJ, Dec-2011", PartNumber=BQ24030RHLR, SubFamily="Battery Charge Management", Vin(Min)(V)=4.3

## Via types
v1: diameter 20, hole 10, Top Layer to Bottom Layer, 68 vias
v2: diameter 19.68, hole 7.87, Top Layer to Bottom Layer, 13 vias
v3: diameter 20, hole 10, Top Layer to Bottom Layer, tented both sides, 1 vias

## Nets (pads, with @x,y where several pads share a name; then routed paths per layer and width w, separated by ;. In a path a pad name is that pad's centre, name@x,y a point inside that pad or via, vN(x,y) a via of type N, cw(c..) or ccw(c..) an arc to the next point about the centre after c; other vN are vias at no path point)
+3V3: C2.2 C3.2 C6.2 C7.2 C11.1 C14.2 P1.1 R4.2 R5.2 R8.1 R10.1 R20.2 R21.2 U1.2 U2.6 U2.7 U5.2 U7.1 | length 964
  Top Layer w10: P1.1 89.33,89.33 U1.2 ; v1(1020,415) R4.2 ; C14.2 v1(1075,875) ; R8.1 v1(1090,785) ; v1(1280,740) C11.1 1280.16,710.59 U7.1 ; R10.1 1296.97,230.75 C6.2 ; v1(1335,260) C6.2 ; U2.7 U2.6 1379.88,235.63 C7.2 C6.2 ; R5.2 v1(1585,125)
  Bottom Layer w10: P1.1 116.5,116.5 C2.2 116.5,198.5 100,215 C3.2 ; v1(507.28,842.28) R21.2 R20.2 ; U5.2 v1(1075,875)
+5: C15.1 D1.1 P1.19 U8.4 U8.8 | length 275.6
  Top Layer w10: v1(1505,665) 1505,667.71 1510.48,673.18 U8.4 ; U8.8 1589.22,665.78 v1(1590,665) ; D1.1 1592.6,494.96 C15.1 v1(1627.28,492.56)
  Bottom Layer w10: v1(1505,665) 1510.95,665 1535.95,640 1565,640 v1(1590,665) ; P1.19 P1.19@1850,60.88
+VO: C8.2 C9.2 C10.2 C12.1 C16.1 P4.1 P5.3 R11.2 U4.5 U6.5 U6.14 U7.6 U8.15 U8.16 U8.17 | length 2276.7
  Top Layer w10: C12.1 1250.75,872.83 U4.5 ; P4.1@1312.5,537.5 P4.1 1205,645 1205,850 1225,870 1248.78,870 U4.5 ; U7.6 1384.65,748.9 C8.2 1385.75,784.78 1370,800.53 1370,855 ; C16.1@1457.56,880 1482.56,855 1500,855 1509.69,845.31 1509.69,830.75 U8.17 U8.16 U8.15 ; C16.1 1457.56,881.06 1431.5,855 1370,855 ; U4.5 v1(1291.89,872.4) 1327.6,872.4 1345,855 1370,855
  Bottom Layer w10: C9.2 731.65,519.37 U6.14 790,455 815,480 870,480 ; C10.2 995,230 970.15,254.85 938.5,254.85 U6.5 885,255 870,270 870,480 ; R11.2 1284.54,867.72 1289.23,872.4 v1(1291.89,872.4) ; P5.3 1260,480 ; P4.1 1298.3,548.3 1298.3,518.3 1260,480 ; 870,480 1260,480
CLK: P2.19 U1.20 | length 1449.6
  Top Layer w5.98: U1.20 760,580 825,645 825,876.54 833.78,885.31 877.24,885.31 890.23,898.31 955.23,898.31 966.18,909.25 1066.18,909.25 1078.15,921.22 1147,921.22 1159.99,934.21 1197.96,934.21 1203.43,939.68 1324.31,939.68 1341.76,957.13 1424.83,957.13 1437.82,970.12 1520.9,970.12 1531.84,981.06 1614.91,981.06 1627.91,994.05 1710.98,994.05 1721.93,1005 1805,1005 P2.19
CMD: P1.18 U1.19 | length 1368.2
  Top Layer w5.98: U1.19 765,530 840,455 840,198.85 860.07,178.78 939.7,178.78 952.69,165.79 1035.77,165.79 1046.56,155 1129.63,155 1147.66,136.97 1230.74,136.97 1237.82,129.88 1420.9,129.88 1432.86,117.91 1482.09,117.91 1499.53,100.47 1616.45,100.47 1622.95,93.98 1706.02,93.98 P1.18
EN: C4.2 P1.2 Q1.3 R4.1 SW1.2 U1.3 | length 1631.2
  Top Layer w5.98: U1.3 139.33,75.03 150,64.36 P1.2 ; SW1.2 v1(1125,230) ; Q1.3 1089.25,375 C4.2 ; R4.1@1090,415 C4.2 ; v1(1125,325) 1125,365 1114.25,375.75 C4.2
  Bottom Layer w5.98: P1.2 220,120 1075,120 1125,170 v1(1125,230) v1(1125,325)
GND: BT1.2 C1.1 C2.1 C3.1 C4.1 C5.1 C6.1 C7.1 C8.1 C9.1 C11.2 C12.2 C13.1 C14.1 C15.2 C16.2 C17.2 C18.2 C19.1 DS1.2 DS2.2 J1.5 J1.6 J1.7 J1.8 J1.9 J1.10 J1.11 P1.14 P2.1 P2.7 P3.2 P4.3 Q3.2 R9.2 R14.1 R15.1 R17.1 R18.1 R19.1 SW1.1 SW2.1 SW3.1 SW3.3 U1.1 U1.15 U1.38 U2.3 U2.29 U3.2 U4.3 U5.13 U6.7 U6.8 U6.9 U6.10 U6.11 U7.5 U8.11 U8.21 | length 3103
  Top Layer w10: U1.1@39.33,217.4 40,218.07 v3(40,270) ; U1.38 39.33,1039.33 P2.1 ; U1.15 760.78,330 780,310.78 v1(780,305) ; v1(864.04,225) 878.07,225 883.07,220 SW1.1 ; v1(920,875) C14.1 994.25,850.75 1020,825 1020,796.93 SW2.1 ; v1(1050,335) 1080.75,335 C4.1 ; v1@1090,610 C5.1 ; v1(1148.82,765.32) U4.3 ; v1(1185,915) 1214.25,915 C12.2 ; v1(1247.72,679.25) C11.2 ; DS2.2@1255,228.78 v1(1255,261.06) ; v1(1310.16,820) C17.2 ; v1(1330,750) C8.1 ; C6.1 C7.1 v1(1375,166.97) ; v1(1360,935) DS1.2 ; v1(1370.16,885) C16.2 ; U7.5 v1(1410,685) ; U2.3 1462.01,294.68 v2(1481.69,275) v2(1525,275) ; R15.1 R18.1 R19.1 v1(1635,940) ; v1(1525,540.16) C18.2 ; C15.2 v1(1627.28,437.44) ; U8.11@1625.37,795.25 1640.25,795.25 v1(1655,810) ; R17.1 v1(1742.24,735) 1776.77,735 1780.79,730.98 1784.72,730.98 1796.54,719.17 SW3.1 ; J1.5 1738.15,367.78 J1.7 ; J1.6 1770.04,170.33 J1.8 J1.9 J1.10 J1.11 1770.04,399.67 J1.7 ; SW3.3 1796.54,490.83 1784.72,479.02 1780.79,479.02 1750.38,448.6 1750.38,440.38 v1(1750,440) 1750,384.27 J1.7
  Bottom Layer w10: v3(40,270) 40,147.28 C2.1@47.28,140 ; v1(535,755) 555,775 U5.13 ; C9.1 v1(810,520) ; v1(780,305) U6.11 U6.10 U6.9 U6.8 U6.7 ; R14.1 C13.1@1043.03,267.28 ; R9.2 v1(1070,185) 1070,244.25 C13.1 C13.1@1043.03,267.28 ; C13.1@1042.72,266.97 C13.1@1043.03,267.28 ; v1(1090,605) 1090.49,605 1105.49,620 Q3.2 ; v1(1742.24,735) C1.1 ; v1(1750,440) 1800,390 U3.2
  other v1: 295,510 345,510 295,555 345,555 295,605 345,605
  other v2: 1481.69,231.69 1525,231.69 1568.31,231.69 1568.31,275 1481.69,318.31 1525,318.31 1568.31,318.31 1540,734.49 1489.8,765 1590.2,765 1540,795.51
IO0: C5.2 P2.14 Q2.3 R8.2 SW2.2 U1.25 | length 1361.1
  Top Layer w5.98: v1(730,860) 721.93,860 706.02,875.91 706.02,876.89 690.32,892.6 U1.25 689.33,924.33 698.19,933.19 737.04,933.19 749.01,945.16 842.08,945.16 855.08,958.15 925.85,958.15 936.8,969.09 1039.09,969.09 1051.06,981.06 1117.99,981.06 1130.98,994.05 1173.17,994.05 1178.65,999.53 1299.53,999.53 P2.14 ; v1(855,860) 875,860 888.07,846.93 SW2.2 954.88,728.19 1018.5,728.19 1024.41,722.28 R8.2 C5.2 1089.25,670 Q2.3
  Bottom Layer w5.98: v1(730,860) v1(855,860)
IO2: P2.15 R3.2 U1.24 | length 947.3
  Top Layer w5.98: U1.24 760.16,809.49 760.16,910 783.35,933.19 847.04,933.19 860.03,946.18 930.81,946.18 941.76,957.13 1044.05,957.13 1056.02,969.09 1122.95,969.09 1135.94,982.09 1178.13,982.09 1183.6,987.56 1304.48,987.56 1321.93,1005 1405,1005 P2.15
  Bottom Layer w5.98: R3.2 P2.15
IO4: P2.13 U1.26 | length 694.5
  Top Layer w5.98: U1.26 639.33,924.33 660.16,945.16 732.08,945.16 744.05,957.13 837.13,957.13 850.12,970.12 920.9,970.12 931.84,981.06 1032.99,981.06 1044.96,993.03 1113.03,993.03 1126.02,1006.02 1168.22,1006.02 1173.69,1011.5 1211.5,1011.5 P2.13
IO5: P2.10 U1.29 | length 553.2
  Top Layer w5.98: U1.29 489.33,939.33 519.09,969.09 537.95,969.09 549.91,981.06 714.91,981.06 726.88,993.03 813.03,993.03 826.02,1006.02 906.02,1006.02 P2.10
IO12: P1.13 U1.14 | length 663.2
  Top Layer w5.98: U1.14 689.33,160.67 700.16,149.84 734.79,149.84 742.78,141.85 825.85,141.85 836.8,130.91 919.87,130.91 932.86,117.91 1015.94,117.91 1026.73,107.13 1109.8,107.13 1128.42,88.5 1211.5,88.5 P1.13
IO13: P1.15 U1.16 | length 955.6
  Top Layer w5.98: U1.16 775,380 803.03,351.97 803.03,181.97 842.13,142.87 924.83,142.87 937.82,129.88 1020.9,129.88 1031.68,119.09 1114.76,119.09 1133.38,100.47 1216.45,100.47 1222.95,93.98 1406.02,93.98 P1.15
IO14: P1.12 U1.13 | length 610.3
  Top Layer w5.98: U1.13 639.33,165.67 651.18,153.82 676.08,153.82 692.02,137.87 729.83,137.87 737.82,129.88 820.9,129.88 831.84,118.94 914.91,118.94 927.91,105.95 1010.98,105.95 1021.93,95 1105,95 P1.12
IO15: P2.16 U1.23 | length 1042.7
  Top Layer w5.98: U1.23 760,730 780,750 780,905 796.22,921.22 852,921.22 864.99,934.21 935.77,934.21 946.71,945.16 1049.01,945.16 1060.98,957.13 1132.13,957.13 1145.12,970.12 1183.09,970.12 1188.56,975.59 1309.44,975.59 1326.88,993.03 1409.96,993.03 1422.95,1006.02 1506.02,1006.02 P2.16
IO16: P2.12 U1.27 | length 650.3
  Top Layer w5.98: U1.27 589.33,934.33 612.13,957.13 727.13,957.13 739.09,969.09 829.09,969.09 842.09,982.09 915.94,982.09 926.88,993.03 1028.03,993.03 1040,1005 1105,1005 P2.12
IO17: P2.11 U1.28 | length 614.5
  Top Layer w5.98: U1.28 539.33,953.55 554.87,969.09 719.87,969.09 731.84,981.06 821.06,981.06 834.05,994.05 910.98,994.05 921.93,1005 1010,1005 1050,1045 P2.11
IO18: P2.9 U1.30 | length 512
  Top Layer w5.98: U1.30 439.33,954.33 466.06,981.06 532.99,981.06 544.96,993.03 709.96,993.03 721.93,1005 805,1005 P2.9
IO19: P2.8 U1.31 | length 462
  Top Layer w5.98: U1.31 389.33,954.33 428.03,993.03 528.03,993.03 540,1005 705,1005 P2.8
IO21: P2.6 R21.1 U1.33 U5.15 | length 781.1
  Top Layer w5.98: U1.33 289.33,949.33 333.03,993.03 383.03,993.03 395,1005 505,1005 P2.6
  Bottom Layer w5.98: R21.1 U5.15 695,875 705,885 705,940 680,965 635,965 P2.6
IO22: P2.3 R20.1 U1.36 U5.16 | length 857.9
  Top Layer w5.98: P2.3 139.33,939.33 U1.36 139.33,855.67 150,845 v1(450,845)
  Bottom Layer w5.98: v1(450,845) 450,935 470,955 535,955 542.72,947.28 R20.1 U5.16
IO23: P2.2 U1.37 | length 182.5
  Top Layer w5.98: U1.37 89.33,989.33 P2.2
IO25: P1.9 U1.10 | length 463.2
  Top Layer w5.98: U1.10 489.33,160.67 519.09,130.91 519.87,130.91 532.86,117.91 612.09,117.91 620,110 669.12,110 677.15,101.97 714.96,101.97 722.95,93.98 806.02,93.98 P1.9
IO26: P1.10 U1.11 | length 513.2
  Top Layer w5.98: U1.11 539.33,160.67 570.12,129.88 666.16,129.88 682.11,113.94 719.91,113.94 727.91,105.95 810.98,105.95 821.93,95 905,95 P1.10
IO27: P1.11 U1.12 | length 563.2
  Top Layer w5.98: U1.12 589.33,160.67 608.15,141.85 671.12,141.85 687.06,125.91 724.87,125.91 732.86,117.91 815.94,117.91 826.88,106.97 909.96,106.97 922.95,93.98 1006.02,93.98 P1.11
IO32: P1.7 U1.8 | length 366.2
  Top Layer w5.98: U1.8 389.33,155.67 438.03,106.97 509.96,106.97 522.95,93.98 599.1,93.98 643.07,50 P1.7
IO33: P1.8 R13.1 U1.9 | length 1372.2
  Top Layer w5.98: v1(589.33,264.33) 454.33,264.33 439.33,249.33 U1.9 439.33,158.51 478.9,118.94 514.91,118.94 527.91,105.95 604.05,105.95 611.97,98.03 664.16,98.03 672.19,90 710,90 P1.8
  Bottom Layer w5.98: v1(589.33,264.33) 655,330 795,330 820,305 820,205 845,180 970,180 1000,150 1075,150 1090,165 R13.1
IO34: P1.5 U1.6 | length 266.2
  Top Layer w5.98: U1.6 289.33,155.67 351.02,93.98 406.02,93.98 P1.5
IO35: P1.6 U1.7 | length 316.2
  Top Layer w5.98: U1.7 339.33,155.67 383.03,111.97 404.96,111.97 421.93,95 505,95 P1.6
NetBT1_1: BT1.1 BT1.3 R12.2 | length 953.6
  Bottom Layer w10: BT1.1 50,639.41 50,470.59 BT1.3 R12.2
NetC10_1: C10.1 R9.1 U6.6 | length 137.2
  Bottom Layer w5.98: U6.6 987.28,205 999.45,192.83 1001.42,192.83 1007.28,186.97 R9.1 1013.15,190.87 1013.15,193.03 1028.46,208.34 1028.46,217.72 C10.1
NetC13_2: C13.2 R13.2 R14.2 U6.4 | length 152.6
  Bottom Layer w5.98: U6.4 1087.72,305 R13.2
NetC19_2: C19.2 R18.2 U8.13 | length 98.5
  Top Layer w5.98: C19.2 1546.97,882.28 R18.2 1589.22,881.5 U8.13
NetD1_3: D1.3 DS3.1 U8.7 U8.9 | length 383.5
  Top Layer w5.98: DS3.1 1470.31,535.31 1485.31,535.31 1490,540 1490,585 1505,600 1545.16,600 1569.53,624.37 ; U8.7 1569.53,624.37 ; U8.9 1608.9,676.1 1630,655 D1.3 1569.53,624.37
NetDS1_1: DS1.1 R3.1 | length 65
  Top Layer w5.98: DS1.1@1449.68,935 1450.31,935.63 1468.34,935.63 v1(1477.72,945)
  Bottom Layer w5.98: R3.1 1462.28,945 v1(1477.72,945)
NetDS2_1: DS2.1 R10.2 | length 55
  Top Layer w5.98: DS2.1 1288.35,178.35 1292.95,182.95 1292.95,195.24 R10.2
NetDS3_2: DS3.2 R16.1 | length 44
  Top Layer w5.98: DS3.2 R16.1
NetJ1_2: J1.2 U2.5 U3.6 | length 614.6
  Top Layer w5.98: v1(1685,260) v1@1685.59,259.41
  Top Layer w9.02: v1@1685.59,259.41 J1.2
  Top Layer w10: v1(1370,265) 1379.69,255.31 U2.5
  Bottom Layer w9: v1(1370,265) 1392.39,265 1468.38,189.02 1584.02,189.02 1630,235 1630,252.39 1647.11,269.51 1675.49,269.51 v1(1685,260) 1695,270 1750,270 1762.6,257.4 U3.6
NetJ1_3: J1.3 U2.4 U3.1 | length 630.7
  Top Layer w5.98: v1(1685,295) v1@1685.51,295
  Top Layer w9.02: v1@1685.51,295 1695.51,285 J1.3
  Top Layer w10: v1(1370,295) 1380,295 1400,275 U2.4
  Bottom Layer w9: v1(1370,295) 1385,295 1475,205 1577.39,205 1614.02,241.62 1614.02,259.02 1640.49,285.49 1675.49,285.49 v1(1685,295) 1695,285 1745,285 1762.6,302.6 U3.1
NetP4_2: P4.2 Q3.1 | length 72.2
  Bottom Layer w5.98: Q3.1 1194.68,617.01 1200,611.69 P4.2
NetP5_1: P5.1 U6.1 | length 244.4
  Bottom Layer w5.98: U6.1 1105,455 P5.1
NetP5_2: P5.2 U7.4 | length 490.5
  Top Layer w5.98: P5.2 1210.16,399.84 1210.16,374.84 1230,355 1305,355 1414.65,464.65 1414.65,585.35 1384.65,615.35 U7.4
NetQ1_1: Q1.1 R6.2 | length 85.9
  Top Layer w5.98: Q1.1 955,414.8 R6.2
NetQ1_2: Q1.2 R7.1 U2.24 | length 919.2
  Top Layer w5.98: R7.1 910,345 917.4,337.6 Q1.2 997.4,337.6 1028.98,306.02 1181.02,306.02 1202.84,327.84 1298.99,327.84 1416.15,445 1520.68,445 1544.69,420.99 U2.24
NetQ2_1: Q2.1 R7.2 | length 210
  Top Layer w5.98: R7.2 910,695 922.4,707.4 Q2.1
NetQ2_2: Q2.2 R6.1 U2.28 | length 679.2
  Top Layer w5.98: Q2.2 955,630.2 R6.1 987.28,532.72 1065,455 1340,455 v1(1355,440) ; v1(1420,375) 1465.07,375 1465.94,374.13 U2.28
  Bottom Layer w5.98: v1(1355,440) v1(1420,375)
NetR5_1: R5.1 U2.9 | length 73.4
  Top Layer w5.98: U2.9 1485.27,177.2 1485.27,161.1 1485,160.83 1485,145 1502.95,127.05 1515.24,127.05 R5.1
NetR12_1: R12.1 U5.14 | length 812.6
  Top Layer w5.98: v1(590,390) 590,780 635,825 v1(705,825)
  Bottom Layer w5.98: R12.1 480,245 590,355 v1(590,390) ; U5.14 v1(705,825)
NetR15_2: R15.2 U8.14 | length 107.3
  Top Layer w5.98: R15.2 1501.97,882.28 1507.83,876.42 1507.83,874.45 1522.28,860 1565,860 1569.53,855.47 U8.14
NetR16_2: R16.2 U8.2 U8.3 | length 62.5
  Top Layer w5.98: R16.2 1470,698.93 U8.2 U8.3
NetR17_2: R17.2 U8.10 | length 47.8
  Top Layer w5.98: U8.10 1671.81,735.48 R17.2
NetR19_2: R19.2 U8.12 | length 64.3
  Top Layer w5.98: U8.12 1608.9,856.18 1627.17,874.45 1627.17,876.42 1633.03,882.28 R19.2
NetU4_4: U4.4 U6.3 | length 866.4
  Top Layer w5.98: v1(1250,760) 1250,796.42 U4.4
  Bottom Layer w5.98: U6.3 1285,355 1325,395 1325,460 1360,495 1360,610 1250,720 v1(1250,760)
RXD: R2.2 U2.25 | length 1384.3
  Top Layer w5.98: v1(845,620) 875.31,589.69 875.31,321.85 903.11,294.05 1196.89,294.05 1216.76,313.92 1301.99,313.92 1418.07,430 1507.84,430 1525,412.84 U2.25
  Bottom Layer w5.98: R2.2 632.05,464.33 642.05,464.33 660,482.28 660,495 745,580 835,580 845,590 v1(845,620)
RXD0: P2.5 R1.1 U1.34 | length 1012.9
  Top Layer w5.98: U1.34 239.33,952.4 292.95,1006.02 368.22,1006.02 382.19,1020 420,1020 P2.5
  Bottom Layer w5.98: P2.5 410,1010 410,580 490,500 R1.1
SD0: P2.18 U1.21 | length 1318.1
  Top Layer w5.98: U1.21 765,630 810,675 810,888.07 819.21,897.28 872.28,897.28 885.27,910.27 950.27,910.27 961.22,921.22 1061.22,921.22 1073.19,933.19 1142.04,933.19 1155.03,946.18 1193,946.18 1198.48,951.65 1319.36,951.65 1336.8,969.09 1419.87,969.09 1432.86,982.09 1515.94,982.09 1526.88,993.03 1609.96,993.03 1622.95,1006.02 1706.02,1006.02 P2.18
SD1: P2.17 U1.22 | length 1178
  Top Layer w5.98: U1.22 765,680 795,710 795,890 814.25,909.25 856.96,909.25 869.95,922.24 940.73,922.24 951.67,933.19 1053.97,933.19 1065.94,945.16 1137.08,945.16 1150.08,958.15 1188.05,958.15 1193.52,963.62 1314.4,963.62 1331.84,981.06 1414.91,981.06 1427.91,994.05 1510.98,994.05 1521.93,1005 1605,1005 P2.17
SD2: P1.17 U1.17 | length 1284.1
  Top Layer w5.98: v1(685,430) U1.17 ; v1(790,430) 826.97,393.03 826.97,194.96 855.11,166.81 934.74,166.81 947.74,153.82 1030.81,153.82 1041.6,143.03 1124.67,143.03 1142.7,125 1225.78,125 1232.86,117.91 1415.94,117.91 1427.91,105.95 1474.05,105.95 1491.5,88.5 1611.5,88.5 P1.17
  Bottom Layer w5.98: v1(685,430) v1(790,430)
SD3: P1.16 U1.18 | length 1132.2
  Top Layer w5.98: U1.18 755,480 765,470 765,420 815,370 815,190 850.16,154.84 929.79,154.84 942.78,141.85 1025.85,141.85 1036.64,131.06 1119.72,131.06 1138.34,112.44 1221.41,112.44 1227.91,105.95 1410.98,105.95 1422.95,93.98 1468.22,93.98 1485.66,76.54 1510.21,76.54 1536.74,50 P1.16
SEN_VN: P1.4 U1.5 | length 213.2
  Top Layer w5.98: U1.5 239.33,160.67 P1.4
SEN_VP: P1.3 U1.4 | length 192.5
  Top Layer w5.98: U1.4 189.33,110.67 P1.3
TXD: R1.2 U2.26 | length 1289.1
  Top Layer w5.98: v1(820,600) 855.63,564.37 855.63,313.69 887.24,282.09 1212.76,282.09 1230.68,300 1305,300 1420,415 1495,415 1505.32,404.68 U2.26
  Bottom Layer w5.98: R1.2 645,500 745,600 v1(820,600)
TXD0: P2.4 R2.1 U1.35 | length 1015.2
  Top Layer w5.98: U1.35 189.33,949.33 246.02,1006.02 276.02,1006.02 290,1020 315,1020 345,1050 P2.4
  Bottom Layer w5.98: P2.4 395,1005 395,545 480,460 R2.1
VBAT: C18.1 P3.1 U8.5 U8.6 | length 376.8
  Top Layer w10: C18.1 1530.16,632.72 U8.5 U8.6 v1(1549.85,665.15) v1@1550,665
  Bottom Layer w10: v1(1549.85,665.15) 1703.86,819.17 1703.86,820.94 P3.1
VBUS: C17.1 D1.2 J1.1 U2.8 U3.5 U8.20 | length 1375.2
  Top Layer w5.98: v1(1460,140) 1460,143.79 1465.94,149.74
  Top Layer w10: C17.1 1440,820 1453.55,806.45 1453.55,795.32 1454.33,794.53 U8.20 ; 1465.94,149.74 U2.8 ; D1.2 v1(1667.4,515) 1667.4,362.4 1660,355 1660,245 v1(1685,220) 1698.82,233.82 J1.1
  Bottom Layer w10: v1(1430,820) 1430,770 1475,725 1475,650 1610,515 v1(1667.4,515) ; v1(1460,140) 1475,155 1620,155 v1(1685,220) 1715,190 1785,190 1800,205 U3.5
WAKEUP: C1.2 Q3.3 R11.1 SW3.2 SW3.4 U4.2 U5.3 | length 1615.5
  Top Layer w5.98: v1(1075,825) 1085,835 U4.2 ; v1(1830,605) 1863.46,605 ; SW3.4 1863.46,605 ; SW3.2 1863.46,605
  Bottom Layer w5.98: U5.3 v1(1075,825) 1077.09,825 1084.37,832.28 R11.1 ; Q3.3 1175,673.98 1170.98,677.99 1167.99,677.99 1115,730.98 R11.1 ; v1(1830,605) 1830,810 1760,880 1630,880 1595,845 1295,845 1282.28,832.28 R11.1
pads on no net: J1.4 U1.32 U2.1 U2.2 U2.10 U2.11 U2.12 U2.13 U2.14 U2.15 U2.16 U2.17 U2.18 U2.19 U2.20 U2.21 U2.22 U2.23 U2.27 U3.3 U3.4 U4.1 U5.1 U5.4 U5.5 U5.6 U5.7 U5.8 U5.9 U5.10 U5.11 U5.12 U6.2 U6.12 U6.13 U7.2 U7.3 U7.7 U8.1 U8.18 U8.19

## Polygon pours and split planes (outlines as drawn)
GND on Int1 (GND) (split plane): 1879.9,20.1 20.1,20.1 20.1,1079.9 1879.9,1079.9
+3V3 on Int2 (PWR) (split plane): 1879.9,702.94 1485,702.94 1482.94,702.67 1481.03,701.88 1479.38,700.62 1478.12,698.97 1477.33,697.06 1477.06,695 1477.06,465 1477.33,462.94 1478.12,461.03 1479.38,459.38 1481.03,458.12 1482.94,457.33 1485,457.06 1792.06,457.06 1792.06,20.1 20.1,20.1 20.1,1079.9 1879.9,1079.9
+5 on Int2 (PWR) (split plane): 1879.9,20.1 1807.94,20.1 1807.94,465 1807.67,467.06 1806.88,468.97 1805.62,470.62 1803.97,471.88 1802.06,472.67 1800,472.94 1492.94,472.94 1492.94,687.06 1879.9,687.06

## Other copper
Int2 (PWR) (plane layer: these items are gaps in the copper):
  lines w15.75: 1800,0 1800,465 1485,465 1485,695 1900,695